# EAGLE board Programmer Board v1 (EAGLE 7.2.0)
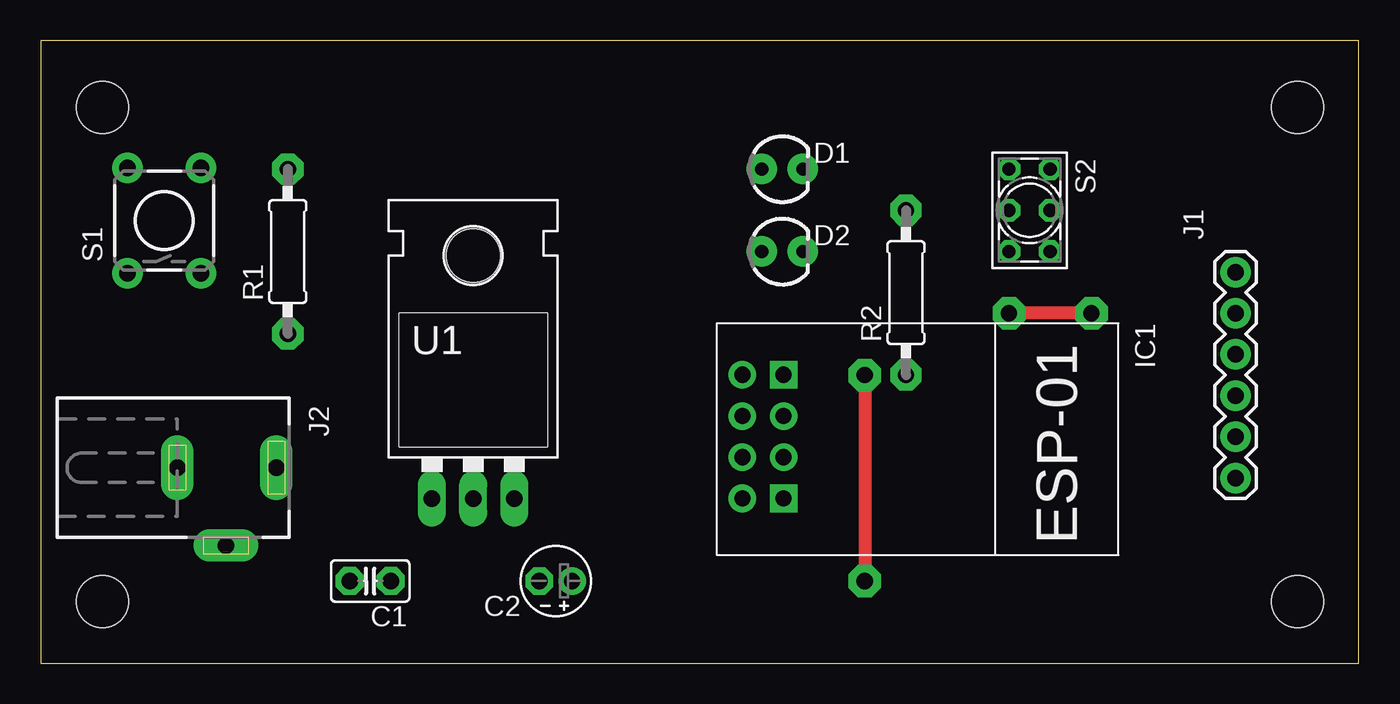
[diagram p0: board, top side]
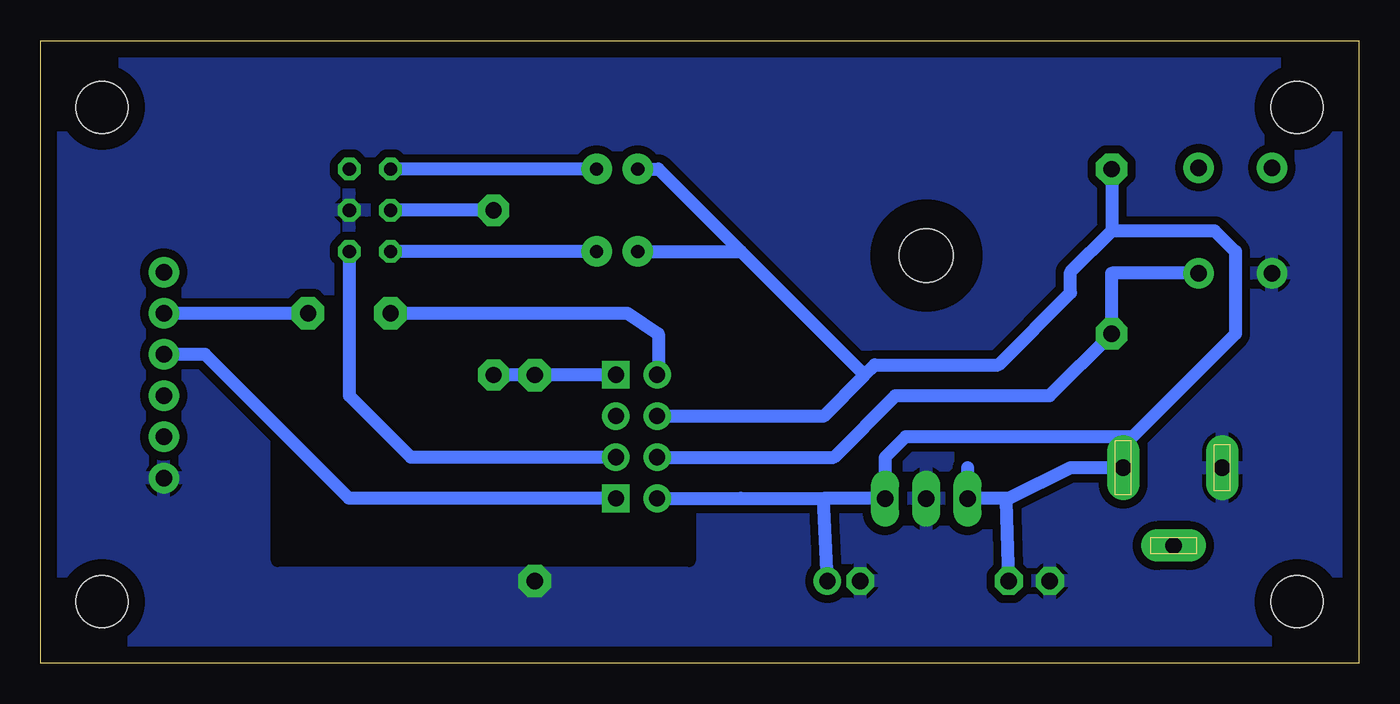
[diagram p1: board, bottom side, seen from below]

Size 81.26 x 38.41 mm. Coordinates in mm from the lower left corner, seen from the top.
Outline: 0,0 81.26,0 81.26,38.41 0,38.41 0,0
Copper layers (1*16): Top 0.035mm / dielectric 1.5mm / Bottom 0.035mm
Design rules "HomeFab": minimum track width 24mil, minimum drill 39mil, track to track 20mil, track to pad 20mil, pad to pad 20mil, via to via 20mil, smd to smd 8mil, copper to edge 40mil, drill to drill 8mil, minimum pad ring 10mil, minimum via ring 8mil, stop-mask expansion 4mil, vias tented up to drill 0mil, thermal gap 10mil
Holes 3.2 mm at 3.81,34.29 77.47,34.29 77.47,3.81 3.81,3.81
bRestrict: area 41.3,6.4 to 66.7,21

## Footprints (pad centres in the part's own frame; a part is rotated, then mirrored left to right if it is on the bottom)
C025-025X050 = drill 1.016 pad 1.676 octagon: 1 -1.27,0; 2 1.27,0
E2-4 = drill 1 pad 1.27: + -1.016,0 | drill 1 pad 1.27 octagon: - 1.016,0
LED3MM = drill 0.813 pad 1.88: A -1.27,0; K 1.27,0
ESP01 = drill 1: CH_PD -1.285,-8.178; GPIO0 1.255,-5.638; GPIO2 -1.285,-5.638; RST 1.255,-8.178; TX -3.825,-8.178; VCC 3.795,-8.178 | drill 1 square: GND -3.825,-5.638; RX 3.795,-5.638
FTDI_BASIC = drill 1.016 pad 1.88: CTS 10.16,0; DTR 0,0; GND 12.7,0; RXI 2.54,0; TXO 5.08,0; VCC 7.62,0
DCJ0202 = drill 1 pad 2 long: 1 0,3.1; 2 4.8,0; 3 0,-3
0207/10 = drill 1 pad 1.93 octagon: 1 -5.08,0; 2 5.08,0
TACTILE-PTH = drill 1.016 pad 1.88: 1 -3.251,2.261; 2 3.251,2.261; 3 -3.251,-2.261; 4 3.251,-2.261
9450-2 = drill 0.813 octagon: 1 -2.54,-1.27; 2 0,-1.27; 3 2.54,-1.27; 4 -2.54,1.27; 5 0,1.27; 6 2.54,1.27
TO-220-ALT = drill 1.016 long: GND 0,-3.81; IN -2.54,-3.81; OUT 2.54,-3.81 | hole 3.302: 0,11.176

## Placement (x,y rotation side)
C1  0.1uF  [C025-025X050]  20.32,5.08 180 top
C2  10uF  [E2-4]  31.75,5.08 180 top
D1  RUN  [LED3MM]  45.72,30.48 0 top
D2  PROG  [LED3MM]  45.72,25.4 0 top
IC1  ESP01  [ESP01]  51.44,13.97 270 top
J1  FTDI  [FTDI_BASIC]  73.66,24.13 270 top
J2  DCJ0202  [DCJ0202]  11.43,12.06 270 top
R1  10k  [0207/10]  15.24,25.4 90 top
R2  75  [0207/10]  53.34,22.86 90 top
S1  RESET  [TACTILE-PTH]  7.62,27.3 90 top
S2  [9450-2]  60.96,27.94 270 top
U1  LM7833  [TO-220-ALT]  26.67,13.97 0 top

## Library data of the parts
C1 C2 R1 R2 = rcl
D1 D2 = SparkFun-LED; PROD_ID: DIO-08794
IC1 = esp8266modules
J1 = SparkFun-Connectors
J2 = con-jack; OC_FARNELL: unknown; OC_NEWARK: unknown
S1 = SparkFun-Electromechanical; PROD_ID: SWCH-08441
S2 = switch-misc
U1 = SparkFun-PowerIC; PROD_ID: VREG-08450; SF_ID: COM-00107

## Nets
+3V3: C2.+ D1.A D2.A IC1.CH_PD IC1.VCC R1.2 U1.OUT
GND: C1.2 C2.- IC1.GND J1.GND J2.3 R2.1 S1.1 S2.5 U1.GND
GPIO0: IC1.GPIO0 S2.6
N$1: D2.K S2.3
N$2: R2.2 S2.2
N$3: D1.K S2.1
RST: IC1.RST R1.1 S1.3
RX: IC1.RX J1.TXO
TX: IC1.TX J1.RXI
VCC: C1.1 J2.1 U1.IN

## Tracks (layer width: path | path; a pad name or v marks a point on that pad's centre or on a via)
+3V3
  Bottom 0.813: 33.02,10.16 U1.OUT 29.21,12.7 27.94,13.97 13.97,13.97 7.62,20.32 7.62,25.4 8.89,26.67 15.24,26.67 | C2.+ 33.02,10.16 | 33.02,10.16 38.1,10.16 38.12,10.18 IC1.VCC | R1.2 15.24,26.67 | IC1.CH_PD 38.12,15.26 38.1,15.24 33.02,15.24 30.48,17.78 | D2.A 38.1,25.4 | D1.A 43.18,30.48 38.1,25.4 | 30.48,17.78 29.84,18.41 22.23,18.41 17.78,22.86 17.78,24.13 15.24,26.67 | 38.1,25.4 30.48,17.78
GND  (via drill 1)
  Top 0.813: v50.8,17.78 v50.8,5.08
  Bottom 0.813: IC1.GND 53.33,17.8 R2.1 v50.8,17.78
  pour Bottom (isolate 0.406): 0,0 0,38.1 81.28,38.1 81.28,0
GPIO0
  Bottom 0.813: IC1.GPIO0 58.44,12.71 62.23,16.51 S2.6
N$1
  Bottom 0.813: D2.K S2.3
N$2
  Bottom 0.813: R2.2 S2.2
N$3
  Bottom 0.813: D1.K S2.1
RST
  Bottom 0.813: S1.3 15.24,24.05 R1.1 19.05,16.51 28.57,16.51 32.37,12.71 IC1.RST
RX
  Bottom 0.813: IC1.RX 62.24,10.18 71.12,19.05 J1.TXO
TX  (via drill 1)
  Top 0.813: v64.77,21.59 v59.69,21.59
  Bottom 0.813: J1.RXI v64.77,21.59 | v59.69,21.59 45.09,21.59 43.18,20.32 43.18,17.87 IC1.TX
VCC
  Bottom 0.813: 24.13,12.06 U1.IN 21.59,10.16 | J2.1 17.78,12.06 21.59,10.16 | C1.1 21.72,10.03 21.59,10.16